# Altium PCB SUB_BPCB.PcbDoc
Units mil, origin at the board's own origin, x right, y up, seen from the top; angles counter-clockwise.
Board outline 2500 x 1500 mil, 2 copper layers (Top Layer, Bottom Layer); 37 components, 25 nets, 105 pads, 12 vias.
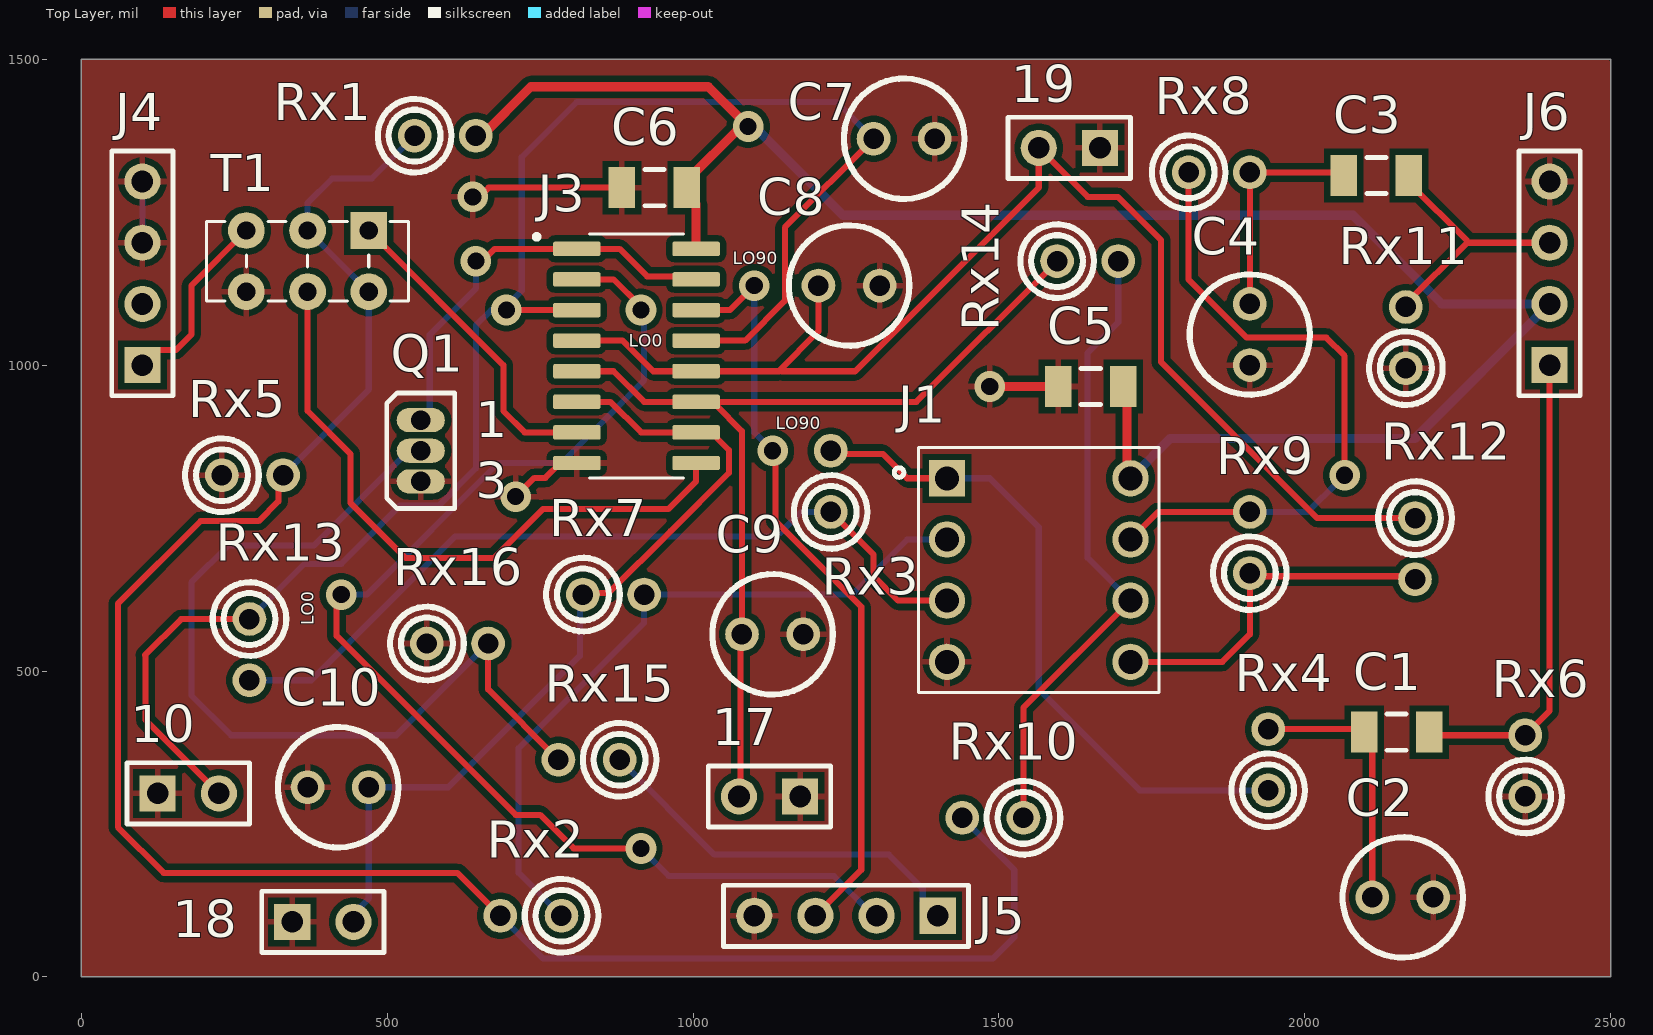
[diagram p0: Top Layer view]
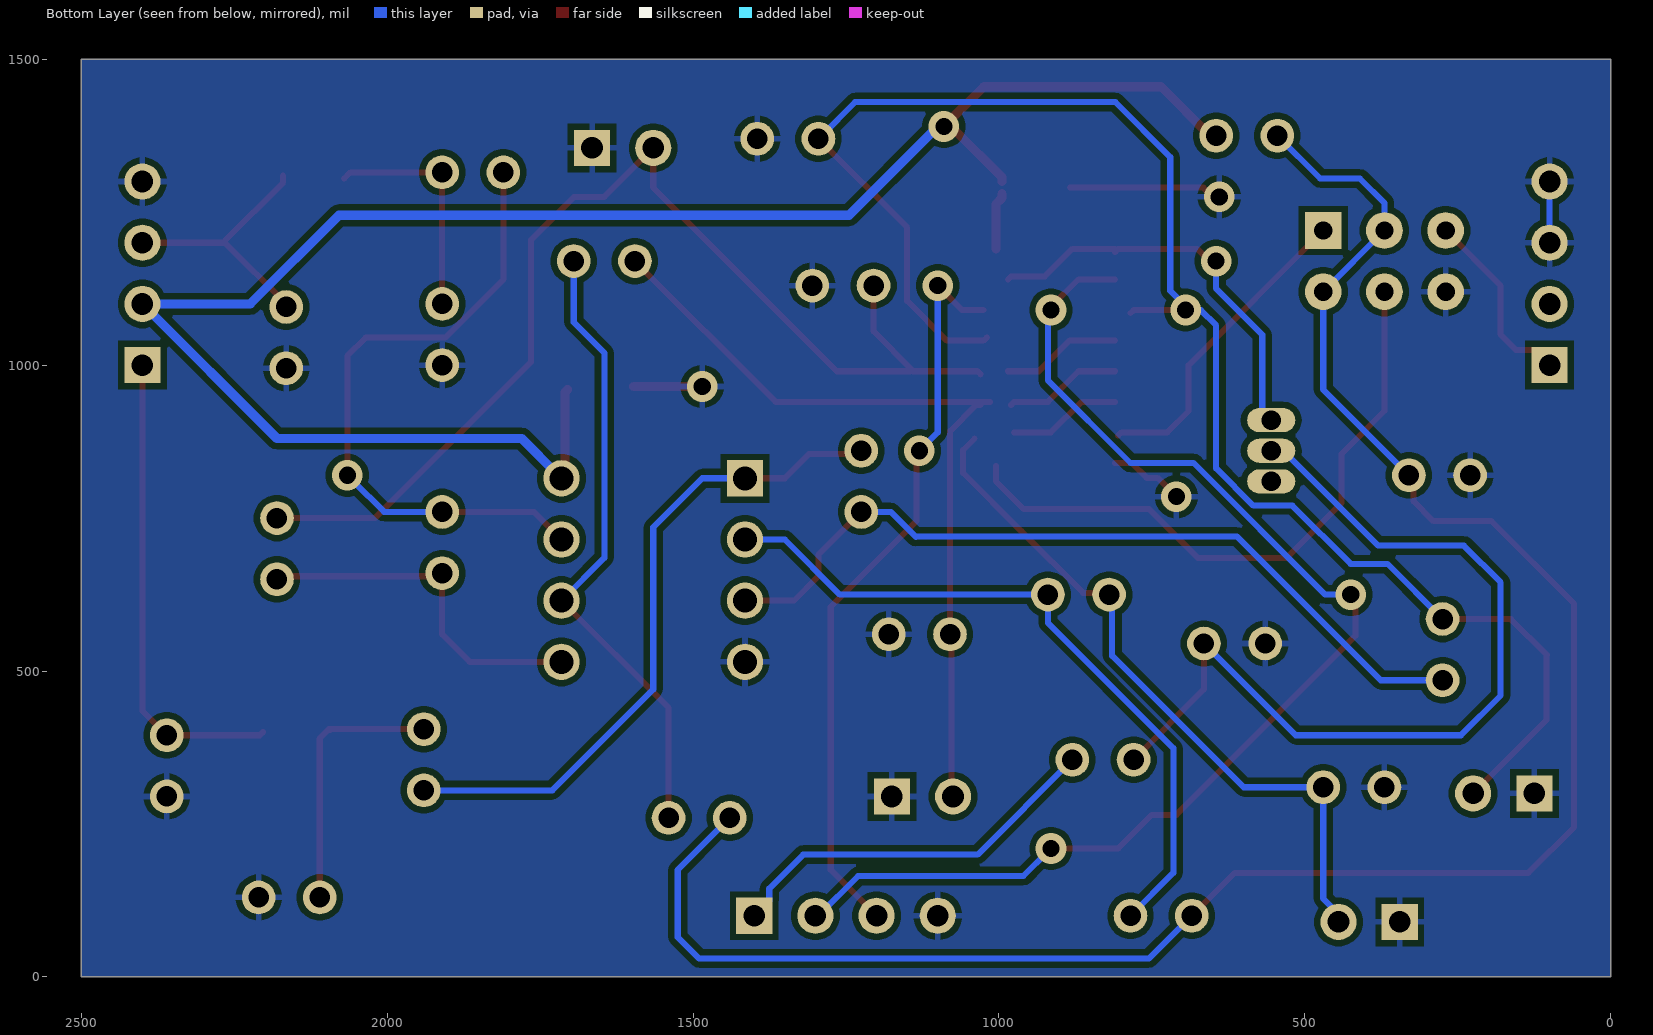
[diagram p1: Bottom Layer view, seen from below]

## Layer stack, top to bottom
Top Solder: solder mask 0.4, Solder Resist, Dk 3.5
Top Layer: signal copper 1.4
Dielectric 1: dielectric 12.6, FR-4, Dk 4.8
Bottom Layer: signal copper 1.4
Bottom Solder: solder mask 0.4, Solder Resist, Dk 3.5

## Board outline
0,0 0,1500 2500,1500 2500,0

## Design rules (kind name [scope] priority, off if disabled: settings)
Clearance [All] p1: gap=10 ignorepadtopadclearanceinfootprint=FALSE except(0: Arc-Hole Track-Hole SMDPad-Hole THPad-Hole Via-Hole Fill-Hole Poly-Hole Region-Hole Text-Hole)
HoleSize [All] p1: absolutevalues=TRUE maxlimit=900 minlimit=12 maxpercent=80.000 minpercent=20.000
MinimumSolderMaskSliver [All] p1: minsoldermaskwidth=1
PolygonConnect [All] p1: connectstyle=Relief reliefconductorwidth=10 reliefentries=4 polygonreliefangle="90 Angle" airgapwidth=10
RoutingVias [All] p1: holewidth=12 width=24 viastyle="Through Hole" minholewidth=12 minwidth=24 maxholewidth=100 maxwidth=200
SilkToSilkClearance [All] p1: silktosilkclearance=0
SilkToSolderMaskClearance [IsPad] p1: minsilkscreentomaskgap=1 clearancetoexposedcopper=TRUE
SolderMaskExpansion [All] p1: expansion=4 istentingtop=FALSE
Width [All] p1: maxlimit=200 minlimit=10 preferedwidth=10
26 further rules are at their usual default settings.

## Components (designator, comment, footprint, x,y, rotation, side; value= is the part's Value field where it differs from the comment)
10 "BUS1_0_TP" HDR1X2 125,300 r0 top
17 "BUS1_270_TP" HDR1X2 1175,295 r180 top
18 "BUS1_180_TP" HDR1X2 345,90 r0 top
19 "BUS1_90_TP" HDR1X2 1665,1355 r180 top
C1 "Cap" 1206 2150,400 r0 top value=10UF
C2 "Cap" RADIAL-0.1 2160,130 r180 top value=100PF
C3 "Cap" 1206 2116.85,1310 r0 top value=10UF
C4 "Cap" RADIAL-0.1 1910,1050 r90 top value=100PF
C5 "Cap" 1206 1650,965 r0 top value=10UF
C6 "Cap" 1206 936.85,1290 r0 top value=10UF
C7 "Cap" RADIAL-0.1 1345,1370 r180 top value=0.22UF
C8 "Cap" RADIAL-0.1 1255,1130 r180 top value=0.22UF
C9 "Cap" RADIAL-0.1 1130,560 r180 top value=0.22UF
C10 "Cap" RADIAL-0.1 420,310 r0 top value=0.22UF
J1 "OP_AMP_SOCKET" TE_1-2199298-2 1565,665 r0 top
J3 "FST3253" SOIC127P600X175-16N 907.56,1015 r0 top
J4 "Header 4" HDR1X4 100,1000 r90 top
J5 "Header 4" HDR1X4 1400,100 r180 top
J6 "Header 4" HDR1X4 2400,1000 r90 top
Q1 "MOSFET-N" E3 555,860 r0 top
Rx1 "Res1" AXIAL-0.1-RES 595,1375 r0 top value=100K
Rx2 "Res1" AXIAL-0.1-RES 735,100 r180 top value=3.3K
Rx3 "Res1" AXIAL-0.1-RES 1225,810 r90 top value=3.3K
Rx4 "Res1" AXIAL-0.1-RES 1940,355 r90 top value=15K
Rx5 "Res1" AXIAL-0.1-RES 280,820 r0 top value=100K
Rx6 "Res1" AXIAL-0.1-RES 2360,345 r90 top value=100K
Rx7 "Res1" AXIAL-0.1-RES 870,625 r0 top value=56
Rx8 "Res1" AXIAL-0.1-RES 1860,1315 r0 top value=15K
Rx9 "Res1" AXIAL-0.1-RES 1910,710 r90 top value=3.3K
Rx10 "Res1" AXIAL-0.1-RES 1490,260 r180 top value=3.3K
Rx11 "Res1" AXIAL-0.1-RES 2165,1045 r90 top value=100K
Rx12 "Res1" AXIAL-0.1-RES 2180,700 r270 top value=56
Rx13 "Res1" AXIAL-0.1-RES 275,535 r270 top value=56
Rx14 "Res1" AXIAL-0.1-RES 1645,1170 r0 top value=56
Rx15 "Res1" AXIAL-0.1-RES 830,355 r180 top value=12K
Rx16 "Res1" AXIAL-0.1-RES 615,545 r0 top value=22K
T1 "Trans CT" BIFILAR-2402 470,1220 r180 top

## Footprints (in the part's own frame and the unit in brackets; to place one, negate y for a bottom-side part, rotate by r counter-clockwise, add the part's x,y. Pads: shape width x height; smd on the part's side, far side on the other; paste and mask are expansions set on the pad)
1206 [mm] "Chip Capacitor, Body 3.2x1.6mm, IPC High Density"
  rect 1.1x1.7 smd: 1(-1.35,0) 2(1.35,0)
  silkscreen extent -0.4,-0.75 0.4,0.75, body extent -1.7,-0.9 1.7,0.9, height 1.3
AXIAL-0.1-RES [mm] "Axial Device, Thru-Hole; 2 Leads; 0.3 in Pin Spacing"
  round 1.4 hole 0.85: 1(-1.27,0) 2(1.27,0)
  silkscreen extent -2.8,-1.53 0.26,1.53
BIFILAR-2402 [mil]
  rect 60x60 hole 30: 1(0,0)
  round 60 hole 30: 2(0,100) 2(100,0) 3(100,100) 4(200,0) 5(200,100)
  silkscreen extent -65,-15 265,115
E3 [mm] "TO, Flat Index; 3 In-Line, Axial Leads; Body Dia. 4.6mm; Lead Dia. 0.5 mm (max)"
  oval 2x1 hole 0.8: 1(0,1.27) 2(0,0) 3(0,-1.27)
  silkscreen extent -1.41,-2.41 1.41,2.41
HDR1X2 [mm] "Connector; Header; 2 Position"
  rect 1.5x1.5 hole 0.9: 1(0,0)
  round 1.5 hole 0.9: 2(2.54,0)
  silkscreen extent -1.27,-1.27 3.81,1.27
HDR1X4 [mm] "Connector; Header; 4 Position"
  rect 1.5x1.5 hole 0.9: 1(0,0)
  round 1.5 hole 0.9: 2(2.54,0) 3(5.08,0) 4(7.62,0)
  silkscreen extent -1.27,-1.27 8.89,1.27
RADIAL-0.1 [mm] "Axial Device, Thru-Hole; 2 Leads; 0.3 in Pin Spacing"
  round 1.4 hole 0.85: 1(-1.27,0) 2(1.27,0)
  silkscreen extent -2.5,-2.5 2.5,2.5
SOIC127P600X175-16N [mm]
  rrect25% 1.97x0.6 smd: 1(-2.475,4.445) 2(-2.475,3.175) 3(-2.475,1.905) 4(-2.475,0.635) 5(-2.475,-0.635) 6(-2.475,-1.905) 7(-2.475,-3.175) 8(-2.475,-4.445) 9(2.475,-4.445) 10(2.475,-3.175) 11(2.475,-1.905) 12(2.475,-0.635) 13(2.475,0.635) 14(2.475,1.905) 15(2.475,3.175) 16(2.475,4.445)
  silkscreen extent -4.24,-5.06 1.95,5.06
TE_1-2199298-2 [mm]
  rect 1.508x1.508 hole 1: 1(-3.81,3.81)
  round 1.508 hole 1: 2(-3.81,1.27) 3(-3.81,-1.27) 4(-3.81,-3.81) 5(3.81,-3.81) 6(3.81,-1.27) 7(3.81,1.27) 8(3.81,3.81)
  silkscreen extent -6,-5.08 5,5.08

## Part data
10 17 18 19: library part "Header 2", "Header, 2-Pin", LatestRevisionDate=17-Jul-2002, LatestRevisionNote="Re-released for DXP Platform.", Publisher="Altium Limited"
C1 C3 C5 C6: library part "CAP CER 10UF 16V X5R 1206", "Capacitor", Manufacturer Part Number=885012108017, Voltage Rating=16V, LatestRevisionDate=17-Jul-2002, LatestRevisionNote="Re-released for DXP Platform.", Published=8-Jun-2000, Publisher="Altium Limited"
C2 C4: library part "CAP CER 100PF 50V C0G/NP0 RADIAL", "Capacitor", Manufacturer Part Number=K101K15C0GF53L2, Voltage Rating=50V, LatestRevisionDate=17-Jul-2002, LatestRevisionNote="Re-released for DXP Platform.", Published=8-Jun-2000, Publisher="Altium Limited"
C7 C8 C9 C10: library part "CAP CER 0.22UF 50V Z5U RADIAL", "Capacitor", Manufacturer Part Number=C320C224M5U5TA, Voltage Rating=50V, LatestRevisionDate=17-Jul-2002, LatestRevisionNote="Re-released for DXP Platform.", Published=8-Jun-2000, Publisher="Altium Limited"
J1: library part 1-2199298-2, "8 _2 x 4_ Pos DIP, 0.3 _7.62mm_ Row Spacing Socket Tin Through Hole", Package=None, Availability=Unavailable, MF="TE Connectivity", MP=1-2199298-2, Price=None, SnapEDA_Link=https://www.snapeda.com/parts/1-2199298-2/TE%20Connectivity%20AMP%20Connectors/view-part/2761758/?ref=snap, Supplier 1=RSComponents, Supplier 2=RSComponents, Supplier Part Number 2=6742435, TE_purchase_URL=https://www.te.com/usa-en/product-1-2199298-2.html?te_bu=Cor&te_type=disp&te_campaign=seda_glo_cor-seda-global-disp-prtnr-fy19-seda-model-bom-cta_sma-317_1&elqCampaignId=32493
J3: "Multiplekser/demultiplekser 2 x 4:1 16-TSSOP", Package="TSSOP-16 ON Semiconductor", Availability="In Stock", Check_prices=https://www.snapeda.com/parts/FST3253/Onsemi/view-part/?ref=eda, MF="ON Semiconductor", MP=FST3253, Price=None, Purchase-URL=https://pricing.snapeda.com/search/part/FST3253/?ref=eda, SnapEDA_Link=https://www.snapeda.com/parts/FST3253/Onsemi/view-part/?ref=snap
J4 J5 J6: "Header, 4-Pin", LatestRevisionDate=17-Jul-2002, LatestRevisionNote="Re-released for DXP Platform.", Publisher="Altium Limited"
Q1: "N-Channel MOSFET", Supplier Part Number 1=BS170-D74Z, LatestRevisionDate=17-Jul-2002, LatestRevisionNote="Re-released for DXP Platform.", PackageDescription="TO, Flat Index; 3 In-Line, Axial Leads; Body Dia. 4.6mm; Lead Dia. 0.5 mm (max)", PackageReference=E3, PackageVersion=1995/1996, Published=8-Jun-2000, Publisher="Altium Limited", Supplier 1=Avnet
Rx1 Rx5 Rx6 Rx11: library part "RES 100K OHM 5% 1/4W AXIAL", "Resistor", Manufacturer Part Number=CFR-25JB-52-100K, Power Rating=1/4W, Tolerance=0.05, LatestRevisionDate=17-Jul-2002, LatestRevisionNote="Re-released for DXP Platform.", Published=8-Jun-2000, Publisher="Altium Limited"
Rx2 Rx3 Rx9 Rx10: library part "RES 3.3K OHM 5% 1/4W AXIAL", "Resistor", Manufacturer Part Number=CFR-25JB-52-3K3, Power Rating=1/4W, Tolerance=0.05, LatestRevisionDate=17-Jul-2002, LatestRevisionNote="Re-released for DXP Platform.", Published=8-Jun-2000, Publisher="Altium Limited"
Rx4 Rx8: library part "RES 15K OHM 5% 1/4W AXIAL", "Resistor", Manufacturer Part Number=CFR-25JB-52-15K, Power Rating=1/4W, Tolerance=0.05, LatestRevisionDate=17-Jul-2002, LatestRevisionNote="Re-released for DXP Platform.", Published=8-Jun-2000, Publisher="Altium Limited"
Rx7 Rx12 Rx13 Rx14: library part "RES 56 OHM 5% 1/4W AXIAL", "Resistor", Manufacturer Part Number=CFR-25JB-52-56R, Power Rating=1/4W, Tolerance=0.05, LatestRevisionDate=17-Jul-2002, LatestRevisionNote="Re-released for DXP Platform.", Published=8-Jun-2000, Publisher="Altium Limited"
Rx15: library part "RES 12K OHM 5% 1/4W AXIAL", "Resistor", Manufacturer Part Number=CFR-25JB-52-12K, Power Rating=1/4W, Tolerance=0.05, LatestRevisionDate=17-Jul-2002, LatestRevisionNote="Re-released for DXP Platform.", Published=8-Jun-2000, Publisher="Altium Limited"
Rx16: library part "RES 22K OHM 5% 1/4W AXIAL", "Resistor", Manufacturer Part Number=CFR-25JB-52-22K, Power Rating=1/4W, Tolerance=0.05, LatestRevisionDate=17-Jul-2002, LatestRevisionNote="Re-released for DXP Platform.", Published=8-Jun-2000, Publisher="Altium Limited"
T1: library part "Centre-tapped transformer wound on a binocular core", "Center-Tapped Transformer (Coupled Inductor Model)", LatestRevisionDate=17-Jul-2002, LatestRevisionNote="Re-released for DXP Platform.", Published=8-Jun-2000, Publisher="Altium Limited"

## Via types
v1: diameter 50, hole 28, Top Layer to Bottom Layer, 12 vias

## Nets (pads, with @x,y where several pads share a name; then routed paths per layer and width w, separated by ;. In a path a pad name is that pad's centre, name@x,y a point inside that pad or via, vN(x,y) a via of type N, cw(c..) or ccw(c..) an arc to the next point about the centre after c; other vN are vias at no path point)
GND: 10.1 17.1 18.1 19.1 C2.1 C4.1 C5.1 C6.1 C7.1 C8.1 C9.1 C10.1 J1.4 J3.8 J4.3 J4.4 J5.4 J6.4 Q1.3 Rx5.1 Rx6.1 Rx11.1 Rx16.1 T1.5 | length 576.7
  Top Layer w10: v1(640,1275) 650.82,1275 665.82,1290 C6.1 ; v1(710,785) 740.63,815.63 758.78,815.63 783.15,840 J3.8
  Top Layer w15: v1@1490,965 C5.1
  Bottom Layer w10: J4.4@95,1295 100,1290 J4.3
  other v1: 1485,965
Net10_2: 10.2 C7.2 J3.3 J3.13 Rx13.1 | length 2701
  Top Layer w10: 10.2 105,420 105,525 104.14,525.86 163.28,585 265,585 Rx13.1@270,580 ; v1(695,1090) 780,1090 J3.3@785,1085 ; J3.13@1020,1045 1025,1040 1085,1040 1150,1105 1150,1225 C7.2
  Bottom Layer w10: Rx13.1 365,675 425,675 520.32,770.32 584.05,770.32 645,831.26 645,1065 670,1090 v1(695,1090) 695,1096.57 720,1121.57 720,1340 810,1430 1235,1430 C7.2@1290,1375
Net17_2: 17.2 C9.2 J3.5 J3.11 Rx14.1 | length 1539.8
  Top Layer w10: J3.5 870,990 920,940 975,940 J3.11@980,935 ; J3.11@1015,940 1365,940 Rx14.1 ; J3.11@1030,935 1036.97,935 1080,891.97 C9.2 1077.5,557.5 1077.5,292.5 17.2@1075,290
Net18_2: 18.2 C10.2 J3.6 J3.10 Rx7.1 | length 1329.3
  Top Layer w10: J3.6 865,940 915,890 J3.10@975,890 ; Rx7.1 822.75,627.75 862.56,627.75 963.48,728.67 963.74,728.67 1058.78,823.71 1058.78,861.22 J3.10@1040,880
  Bottom Layer w10: 18.2@440,90 440,97.97 470,127.97 C10.2 600,310 815,525 815,610 Rx7.1@820,615
Net19_2: 19.2 C8.2 J3.4 J3.12 Rx12.1 | length 2062
  Top Layer w10: J3.4 885,1040 935,990 J3.12@985,990 ; J3.12@1030,985 1035,990 1140,990 1205,1055 C8.2 ; 1145,990 1265,990 1565,1290 19.2 1645.12,1274.88 1694.26,1274.88 1765,1204.14 ; 1765,1200 1765,1005 2020,750 Rx12.1
NetC1_1: C1.1 C2.2 Rx4.2 | length 437.4
  Top Layer w10: Rx4.2@1940,400 1945,405 2091.85,405 C1.1@2093.43,403.43 ; C1.1@2095,405 2110,390 C2.2
NetC1_2: C1.2 J6.1 Rx6.2 | length 773.4
  Top Layer w10: C1.2 2208.15,395 2350,395 Rx6.2@2355,390 ; Rx6.2@2360,405 2370,405 2400,435 J6.1
NetC3_1: C3.1 C4.2 Rx8.2 | length 374.1
  Top Layer w10: C4.2@1910,1105 Rx8.2 2060,1315 C3.1@2070,1305
NetC3_2: C3.2 J6.3 Rx11.2 | length 435.8
  Top Layer w10: Rx11.2@2165,1090 Rx11.2 2165,1100 2265,1200 ; C3.2 2170,1298.19 2265,1203.19 2265,1200 ; J6.3 2265,1200
NetC5_2: C5.2 C6.2 J1.8 J3.16 J6.2 Rx1.2 | length 3115.7
  Top Layer w10: J1.8@1705,815 J1.8@1710,820
  Top Layer w15: Rx1.2 655,1375 735,1455 1025,1455 1085,1395 v1@1085,1390 ; C6.2@995,1280 995,1273.19 1005,1263.19 J3.16 ; C6.2@995,1300 995,1306.81 1071.49,1383.3 1083.3,1383.3 v1(1090,1390) ; C5.2@1705,960 1709.07,955.93 1709.07,820.93 1710,820 J1.8
  Bottom Layer w10: J1.8@1710,820 J1.8@1720,820
  Bottom Layer w15: v1@1100,1390 1245,1245 2078.72,1245 2223.72,1100 J6.2 2180,880 1780,880 J1.8@1720,820
NetJ1_1: J1.1 Rx3.2 Rx4.1 | length 1088.1
  Top Layer w10: Rx3.2@1225,855 1310,855 1350,815 J1.1
  Bottom Layer w10: J1.1@1425,815 1485,815 1565,735 1565,470 1730,305 Rx4.1
NetJ1_2: J1.2 Rx2.1 Rx7.2 | length 1166.2
  Bottom Layer w10: Rx2.1 715,170 715,373.9 920,578.9 Rx7.2 1260,625 1350,715 J1.2@1410,715
NetJ1_3: J1.3 Rx3.1 Rx13.2 | length 1332.3
  Top Layer w10: Rx3.1 1295,690 1295,655 1335,615 1405,615 J1.3@1410,610
  Bottom Layer w10: Rx13.2 376.1,485 611.1,720 1135,720 1135.86,719.14 1176.72,760 Rx3.1
NetJ1_5: J1.5 Rx9.1 Rx12.2 | length 592.8
  Top Layer w10: J1.5 1865,515 1910,560 Rx9.1@1910,655 ; Rx9.1@1905,660 Rx9.1@1910,655 ; Rx9.1 Rx9.1@1910,655 ; Rx12.2 2175,655 Rx9.1@1910,655
NetJ1_6: J1.6 Rx10.1 Rx14.2 | length 1037.2
  Top Layer w10: Rx10.1 1540,440 J1.6
  Bottom Layer w10: Rx14.2 1695,1070 1645,1020 1645,685 J1.6 J1.6@1720,615
NetJ1_7: J1.7 Rx8.1 Rx9.2 | length 1044.2
  Top Layer w10: J1.7@1720,715 1720,720 1760,760 Rx9.2 ; Rx8.1 1810,1139.81 1904.81,1045 2035,1045 2065,1015 v1@2065,840
  Bottom Layer w10: Rx9.2 2005,760 2055,810 v1@2055,820
  other v1: 2065,820
NetJ3_1: J3.1 J3.15 Q1.1 | length 668.9
  Top Layer w10: v1(645,1170) 655.82,1170 675.82,1190 805,1190 J3.1@810,1185 ; J3.1 880,1190 925,1145 980,1145 J3.15@985,1140
  Bottom Layer w10: Q1.1 556.12,910 569.68,923.57 569.68,1049.68 645,1125 v1(645,1170)
NetJ3_2: J3.2 J5.2 | length 2026.2
  Top Layer w10: v1(425,625) 417.35,617.35 417.35,557.65 710,265 750,265 805,210 v1(915,210) ; J3.2 870,1140 915,1095 v1(915,1090) ; J5.2@1290,90 J5.2@1295,90
  Bottom Layer w10: v1(425,625) 467.02,625 682.02,840 785,840 920,975 920,1085 v1(915,1090) ; v1@920,205 960,165 1230,165 1295,100 J5.2
NetJ3_7: J3.7 T1.1 | length 517.7
  Top Layer w10: T1.1 690,1000 690,925 725,890 800,890 J3.7@805,885
NetJ3_9: J3.9 T1.3 | length 1053.1
  Top Layer w10: T1.3 370,925 440,855 440,775 530,685 675,685 755,765 960,765 1005,810 J3.9@1005,835
NetJ3_14: J3.14 J5.3 | length 1225.1
  Top Layer w10: J3.14@1025,1090 1060,1090 v1(1100,1130) ; v1@1135,855 1135,745 1275,605 1275,175 J5.3
  Bottom Layer w10: v1@1105,1135 v1(1100,1130) 1100,890 v1(1130,860)
NetJ4_1: J4.1 T1.4 | length 305.9
  Top Layer w10: J4.1@105,1000 105,1005 124.53,1024.53 154.53,1024.53 180,1050 180,1130 T1.4
NetJ5_1: J5.1 Rx15.1 | length 637.3
  Bottom Layer w10: Rx15.1 1035,200 1320,200 1375.47,144.53 1375.47,124.53 J5.1
NetQ1_2: Q1.2 Rx15.2 Rx16.2 | length 1466.6
  Top Layer w10: Rx16.2 665,470 Rx15.2 Rx15.2@780,350
  Bottom Layer w10: Q1.2 535.32,860 380.32,705 240,705 180,645 180,460 245,395 515,395 655,535 Rx16.2@670,535
NetRx1_1: Rx1.1 Rx2.2 Rx5.2 Rx10.2 T1.2 | length 3293.5
  Top Layer w10: Rx5.2@335,820 322.44,807.44 322.44,777.44 290,745 195,745 60,610 60,245 135,170 615,170 Rx2.2@680.17,104.83
  Bottom Layer w10: Rx5.2 470,960 470,1110 T1.2@465,1115 ; T1.2@370,1220 T1.2@470,1120 ; T1.2@375,1220 370,1225 370,1265 410,1305 475,1305 Rx1.1 ; Rx2.2 755,30 1490,30 1525,65 1525,175 Rx10.2@1445,255
pads on no net: J4.2

## Polygon pours and split planes (outlines as drawn)
GND on Bottom Layer "GND_L02_P002" (solid, pour order 2): 0,1500 2500,1500 2500,0 0,0
GND on Top Layer "GND_L01_P003" (solid, pour order 3): 0,1500 0,0 2500,0 2500,1495 2495,1500

## Silkscreen, mask and mechanical layers (free items; w line width, h text height)
Top Overlay:
  text "LO90" at 1065,1165 h20
  text "LO0" at 895,1030 h20
  text "LO90" at 1135,895 h20
  text "LO0" at 380,575 h20 r90

## Text inside footprints (layer, text, board x,y; h text height)
Q1: Top Overlay "1" at 644.57,881.85 h59.05; Top Overlay "3" at 644.57,782.72 h59.05